# Altium PCB BOARD.PcbDoc
Units mm, origin at the board's own origin, x right, y up, seen from the top; angles counter-clockwise.
Board outline 40 x 23 mm, 2 copper layers (Top Layer, Bottom Layer), stack 1.18 mm thick; 82 components, 63 nets, 278 pads, 112 vias.
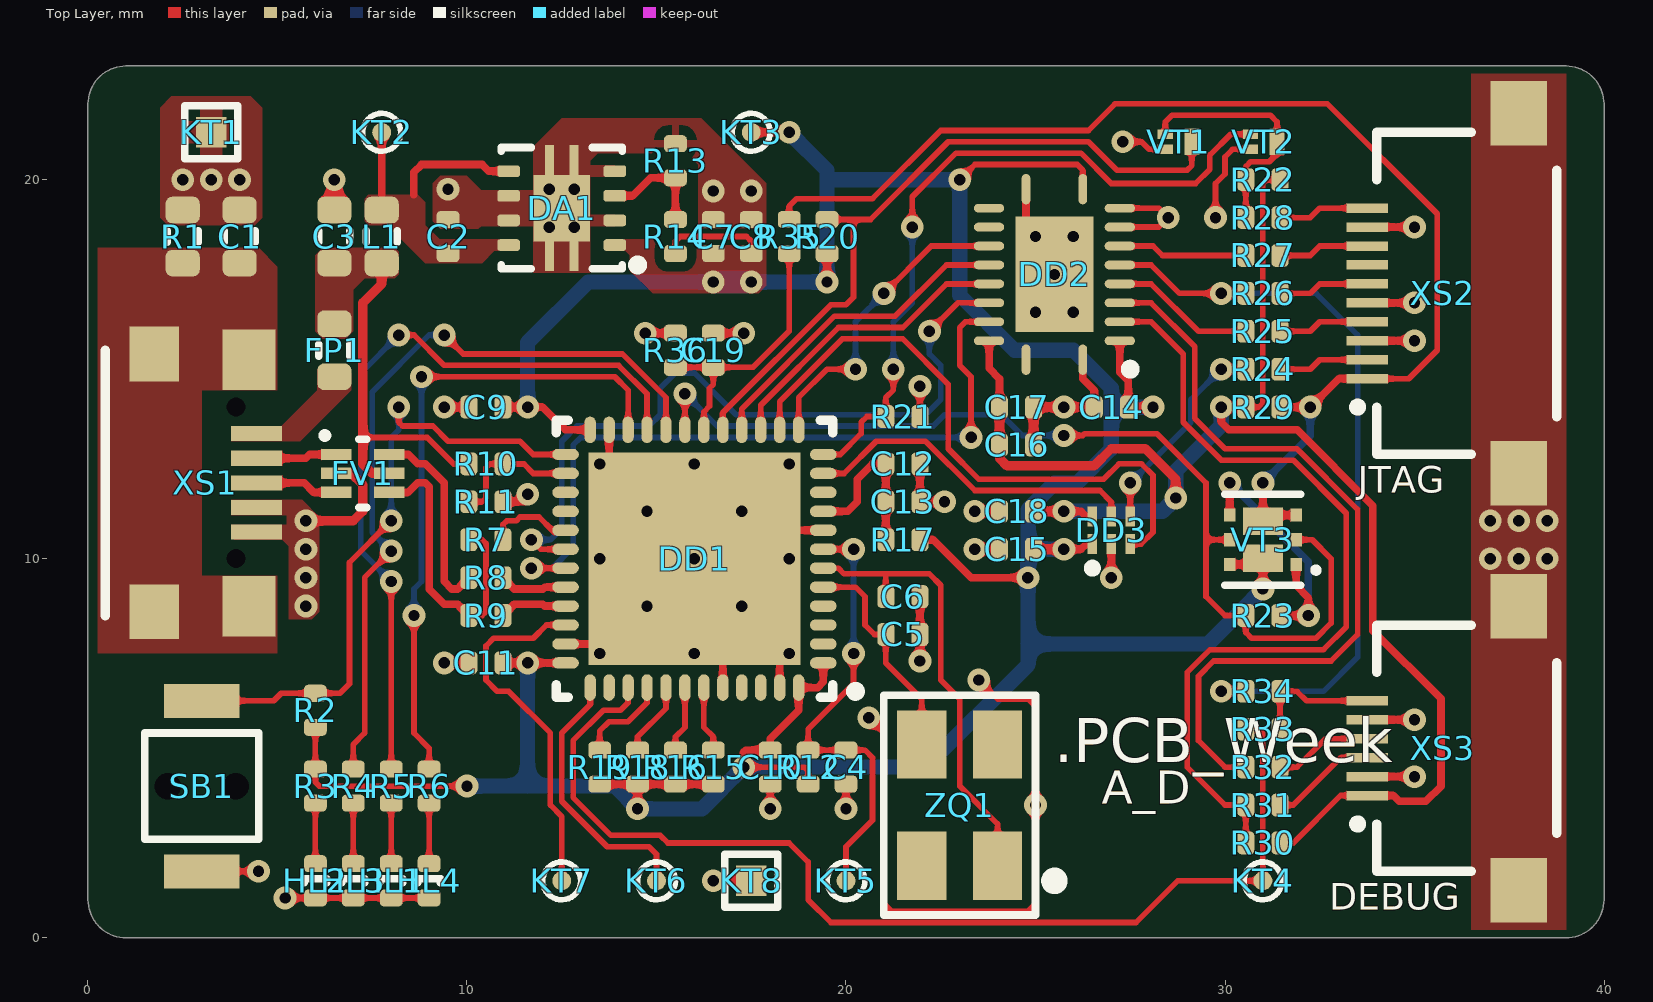
[diagram p0: Top Layer view]
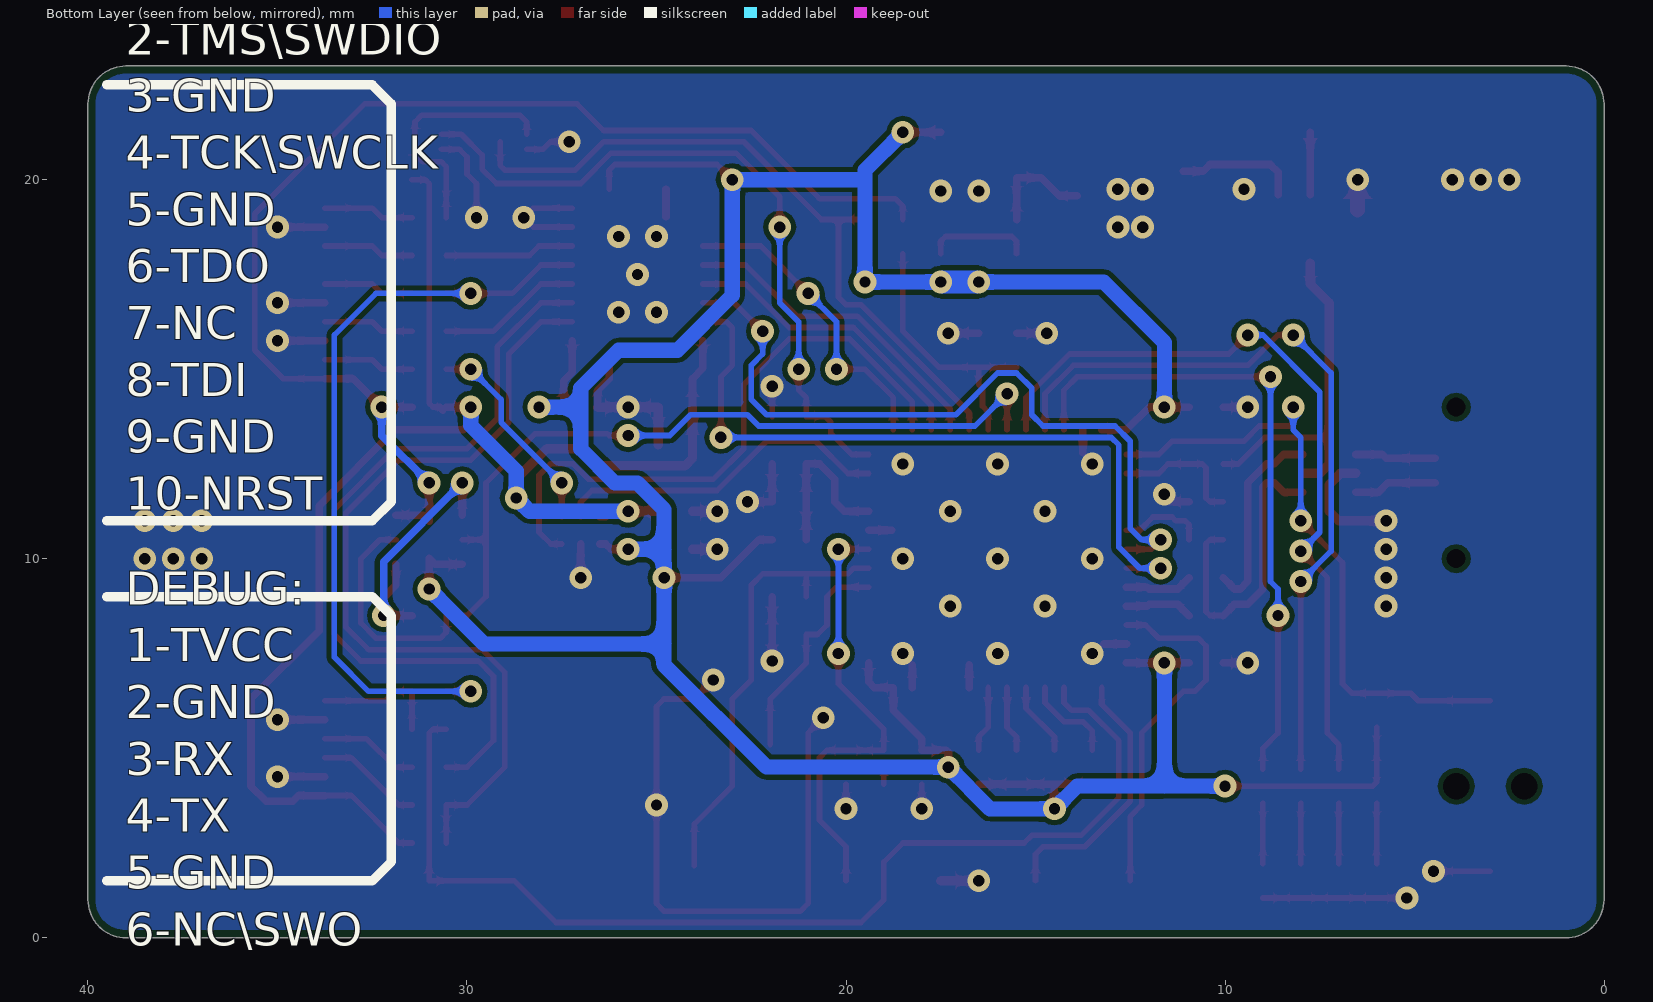
[diagram p1: Bottom Layer view, seen from below]
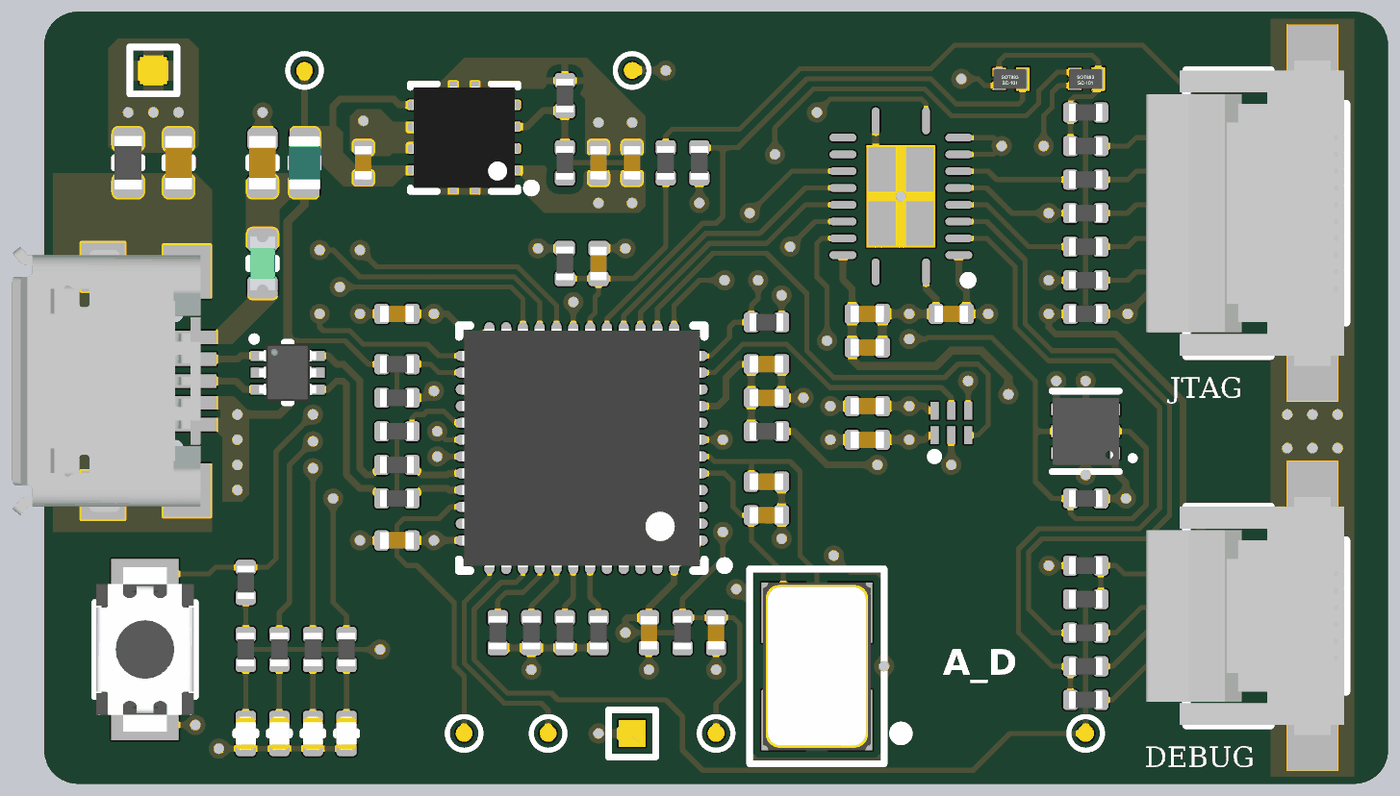
[diagram p2: 3D render of the assembled board from above, using the file's embedded part models]

## Layer stack, top to bottom
Top Solder: solder mask 0.01, Solder Resist, Dk 3.5
Top Layer: signal copper 0.03
Dielectric1: core 1.12, FR-4, Dk 4.2
Bottom Layer: signal copper 0.03
Bottom Solder: solder mask 0.01, Solder Resist, Dk 3.5

## Board outline
0,1 0,22 cw(c1,22) 1,23 39,23 cw(c39,22) 40,22 40,1 cw(c39,1) 39,0 1,0 cw(c1,1)

## Design rules (kind name [scope] priority, off if disabled: settings)
BoardOutlineClearance [All] p1: gap=0.2 ignorepadtopadclearanceinfootprint=FALSE
Clearance [All] p1: gap=0.127 ignorepadtopadclearanceinfootprint=FALSE
ComponentClearance [All] p1 off: gap=0.25 collisioncheckmode=3 verticalgap=0.25 showdistances=FALSE
DiffPairsRouting [All] p1: maxlimit=0.4 minlimit=0.15 mostfreqgap=0.25 toplayer_minwidth=0.2 toplayer_maxwidth=0.4 toplayer_prefwidth=0.25 bottomlayer_minwidth=0.2 bottomlayer_maxwidth=0.4 bottomlayer_prefwidth=0.25 maxuncoupledlength=12
Height [All] p1: minheight=0 maxheight=25 prefheight=25
HoleSize [All] p1: absolutevalues=TRUE maxlimit=6 minlimit=0.3 maxpercent=80.000 minpercent=20.000
HoleToHoleClearance [All] p1: gap=0.25 allowstackedmicrovias=TRUE
MatchedLengths "Schematic Matched Net Lengths" [InNet('USBD_N')] p1: tolerance=1 checknetsindiffpair=TRUE checkdiffpairvsdiffpair=FALSE checkxsignals=FALSE checkothers=FALSE
MatchedLengths "Schematic Matched Net Lengths_1" [InNet('USBD_P')] p2: tolerance=1 checknetsindiffpair=TRUE checkdiffpairvsdiffpair=FALSE checkxsignals=FALSE checkothers=FALSE
MinimumSolderMaskSliver [All] p1 off: minsoldermaskwidth=0.254
PlaneClearance [All] p1: clearance=0.5
PlaneConnect [All] p1: planeconnectstyle=Relief reliefexpansion=0.5 reliefentries=4 reliefconductorwidth=0.25 reliefairgap=0.25
PolygonConnect PolygonConnect_DirectConnect [InComponentClass('DirectConnect')] p1: connectstyle=Direct reliefconductorwidth=0.254 reliefentries=4 polygonreliefangle="90 Angle" airgapwidth=0.254
PolygonConnect PolygonConnect_Components [InComponent('C*') OR InComponent('R*') OR InComponent('NR*') OR InComponent('DA*') OR InComponent('DD*') OR InComponent('HL*')] p2: connectstyle=Relief reliefconductorwidth=0.2 reliefentries=4 polygonreliefangle="90 Angle" airgapwidth=0.25
PolygonConnect PolygonConnect_Connectors [All vs (InPadClass('All Pads'))] p3: connectstyle=Relief reliefconductorwidth=0.6 reliefentries=4 polygonreliefangle="90 Angle" airgapwidth=0.3
PolygonConnect PolygonConnect_Via [All] p4: connectstyle=Direct reliefconductorwidth=0.254 reliefentries=4 polygonreliefangle="90 Angle" airgapwidth=0.254
RoutingCorners [All] p1: cornerstyle=45-Degree minsetback=1.5 maxsetback=3.5
RoutingVias [All] p1: holewidth=0.6 width=1.2 viastyle="Through Hole" minholewidth=0.3 minwidth=0.6 maxholewidth=1 maxwidth=2
SMDEntry [All] p1: side=TRUE corner=TRUE anyangle=TRUE
SilkToSilkClearance [All] p1 off: silktosilkclearance=0.254
SilkToSolderMaskClearance [IsPad] p1 off: minsilkscreentomaskgap=0.254 clearancetoexposedcopper=TRUE
SolderMaskExpansion [All] p1: expansion=0.05
Width [All] p1: maxlimit=8 minlimit=0.15 preferedwidth=0.6
Width Width_TrackEnds [All] p2 off: maxlimit=0.25 minlimit=0.25 preferedwidth=0.25 checkconnectedcopper=TRUE
19 further rules are at their usual default settings.

## Classes and differential pairs
component class DirectConnect: C1 C2 C3 C7 C8 DA1 FP1 L1 R1 XS1 XS2 XS3
differential pair class USB: USBD
differential pair USBD: +USBD_P -USBD_N

## Components (designator, comment, footprint, x,y, rotation, side; value= is the part's Value field where it differs from the comment)
C1 "Capacitor" C0603_L 4,18.5 r270 top value=0.1uF
C2 "Capacitor" C0402_L 9.5,18.5 r270 top value=4.7uF
C3 "Capacitor" C0603_L 6.5,18.5 r270 top value=10uF
C4 "Capacitor" C0402_L 20,4.5 r90 top value=0.1uF
C5 "Capacitor" C0402_L 21.5,8 r180 top value=15pF
C6 "Capacitor" C0402_L 21.5,9 r180 top value=15pF
C7 "Capacitor" C0402_L 16.5,18.5 r270 top value=4.7uF
C8 "Capacitor" C0402_L 17.5,18.5 r270 top value=4.7uF
C9 "Capacitor" C0402_L 10.5,14 r0 top value=0.1uF
C10 "Capacitor" C0402_L 18,4.5 r90 top value=0.1uF
C11 "Capacitor" C0402_L 10.5,7.25 r0 top value=0.1uF
C12 "Capacitor" C0402_L 21.5,12.5 r0 top value=1uF
C13 "Capacitor" C0402_L 21.5,11.5 r180 top value=0.1uF
C14 "Capacitor" C0402_L 27,14 r0 top value=0.1uF
C15 "Capacitor" C0402_L 24.5,10.25 r0 top value=0.1uF
C16 "Capacitor" C0402_L 24.5,13 r0 top value=1uF
C17 "Capacitor" C0402_L 24.5,14 r180 top value=0.1uF
C18 "Capacitor" C0402_L 24.5,11.25 r0 top value=0.1uF
C19 "Capacitor" C0402_L 16.5,15.5 r270 top value=0.1uF
DA1 "TPS73701DRB" VSON-8_065P300X300X100_N 12.5,19.25 r90 top value=TPS73701DRBR
DD1 "STM32F103CxUx-Series" UFQFPN-48_050P700X700X060_N 16,10 r180 top locked value=STM32F103CBU6
DD2 "TXS0108ERGY" VQFN-20_050P450X350X100_N 25.5,17.5 r90 top locked value=TXS0108ERGYR
DD3 "74LVC1T45x-Series" X2-DFN-6_050P140X100X040_N 27,10.75 r0 top value=74LVC1T45FZ4-7
FP1 "Fuse_PTC" F0603_L 6.5,15.5 r90 top value=0603L100SLYR
FV1 "USBLC6-2x6" SOT-666_050P160X120X060_N 7.25,12.25 r270 top value=USBLC6-2P6
HL1 "" LD0402_L 8,1.5 r270 top value=KPHHS-1005SURCK
HL2 "Text" LD0402_L 6,1.5 r270 top value=KPHHS-1005CGCK
HL3 "Text" LD0402_L 7,1.5 r270 top value=KPHHS-1005CGCK
HL4 "" LD0402_L 9,1.5 r270 top value=KPHHS-1005QBC-D-V
KT1 "Text" TP-SMT-R-0.8mm 3.25,21.25 r0 top value=TestPoint-SMT
KT2 "Text" TP-SMT-C-0.5mm 7.75,21.25 r0 top value=TestPoint-SMT
KT3 "Text" TP-SMT-C-0.5mm 17.5,21.25 r0 top value=TestPoint-SMT
KT4 "SWO" TP-SMT-C-0.5mm 31,1.5 r0 top value=TestPoint-SMT
KT5 "SWO" TP-SMT-C-0.5mm 20,1.5 r0 top value=TestPoint-SMT
KT6 "SWO" TP-SMT-C-0.5mm 15,1.5 r0 top value=TestPoint-SMT
KT7 "SWO" TP-SMT-C-0.5mm 12.5,1.5 r0 top value=TestPoint-SMT
KT8 "Text" TP-SMT-R-0.8mm 17.5,1.5 r0 top value=TestPoint-SMT
L1 "FerriteBead" L0603_L 7.75,18.5 r90 top value=BLM18PG121SN1
R1 "Resistor" R0603_L 2.5,18.5 r270 top value=0
R2 "Resistor" R0402_L 6,6 r270 top value=10k
R3 "Resistor" R0402_L 6,4 r90 top value=1k
R4 "Resistor" R0402_L 7,4 r90 top value=1k
R5 "Resistor" R0402_L 8,4 r90 top value=1k
R6 "Resistor" R0402_L 9,4 r90 top value=1k
R7 "Resistor" R0402_L 10.5,10.5 r0 top value=1.6k
R8 "Resistor" R0402_L 10.5,9.5 r0 top value=20
R9 "Resistor" R0402_L 10.5,8.5 r0 top value=20
R10 "Resistor" R0402_L 10.5,12.5 r180 top value=4.7k
R11 "Resistor" R0402_L 10.5,11.5 r180 top value=10k
R12 "Resistor" R0402_L 19,4.5 r270 top value=10k
R13 "Resistor" R0402_L 15.5,20.5 r270 top value=12k
R14 "Resistor" R0402_L 15.5,18.5 r270 top value=22.1k
R15 "Resistor" R0402_L 16.5,4.5 r270 top value=0
R16 "Resistor" R0402_L 15.5,4.5 r270 top value=0
R17 "Resistor" R0402_L 21.5,10.5 r0 top value=0
R18 "Resistor" R0402_L 14.5,4.5 r270 top value=0
R19 "Resistor" R0402_L 13.5,4.5 r270 top value=0
R20 "Resistor" R0402_L 19.5,18.5 r270 top value=10k
R21 "Resistor" R0402_L 21.5,13.75 r0 top value=10k
R22 "Resistor" R0402_L 31,20 r0 top value=10k
R23 "Resistor" R0402_L 31,8.5 r0 top value=10k
R24 "Resistor" R0402_L 31,15 r0 top value=100
R25 "Resistor" R0402_L 31,16 r0 top value=100
R26 "Resistor" R0402_L 31,17 r0 top value=100
R27 "Resistor" R0402_L 31,18 r0 top value=100
R28 "Resistor" R0402_L 31,19 r0 top value=100
R29 "Resistor" R0402_L 31,14 r0 top value=100
R30 "Resistor" R0402_L 31,2.5 r180 top value=10k
R31 "Resistor" R0402_L 31,3.5 r0 top value=100
R32 "Resistor" R0402_L 31,4.5 r0 top value=100
R33 "Resistor" R0402_L 31,5.5 r180 top value=0
R34 "Resistor" R0402_L 31,6.5 r180 top value=0
R35 "Resistor" R0402_L 18.5,18.5 r90 top value=4.7k
R36 "Resistor" R0402_L 15.5,15.5 r270 top value=10k
SB1 "" IT-1185AP 3,4 r180 top locked value=IT-1185AP
VT1 "MOSFET-N" SOT-883B_035P060X100X040_N 28.75,21 r270 top value=NX3008NBKMB
VT2 "MOSFET-N" SOT-883B_035P060X100X040_N 31,21 r270 top value=NX3008NBKMB
VT3 "MOSFET-PP_8p_2" SOT-1118-2M_065P200X200X065_N 31,10.5 r90 top value=PMDPB70XP
XS1 "USB" 1981568-1 2,12 r270 top locked value=1981568-1
XS2 "JTAG" XF2M-1015-1A 36,17 r270 top locked value=XF2M-1015-1A
XS3 "DEBUG" XF2M-0615-1A 36,5 r270 top locked value=XF2M-0615-1A
ZQ1 "Crystal" "SMD 5x3.2mm" 23,3.5 r90 top value="KX-9A 8.0 MHz 30/50/100 16 pF"

## Footprints (in the part's own frame and the unit in brackets; to place one, negate y for a bottom-side part, rotate by r counter-clockwise, add the part's x,y. Pads: shape width x height; smd on the part's side, far side on the other; paste and mask are expansions set on the pad)
1981568-1 [mm]
  round 0 hole 0.5 unplated: 0(-2,1.9) 0(2,1.9)
  rect 0.4x1.35 smd: 1(-1.3,2.45) 2(-0.65,2.45) 3(0,2.45) 4(0.65,2.45) 5(1.3,2.45)
  rect 1.45x1.3 smd: 6(-3.4,-0.25) 6(3.4,-0.25)
  rect 1.6x1.4 smd: 6(-3.25,2.25) 6(3.25,2.25)
  silkscreen extent -3.5,-1.55 3.5,-1.55, body extent -4,-2.95 4,2.65, height 2.79
C0402_L [mm] "Chip Capacitor; Body 1.0 x 0.5 mm (LxW typ)"
  rrect50% 0.45x0.6 smd: 1(-0.45,0) 2(0.45,0)
  body extent -0.5,-0.25 0.5,0.25, height 0.61
C0603_L [mm] "Chip Capacitor; Body 1.6 x 0.8 mm (LxW typ)"
  rrect50% 0.7x0.9 smd: 1(-0.7,0) 2(0.7,0)
  silkscreen extent -0.15,-0.41 0.15,0.41, body extent -0.8,-0.4 0.8,0.4, height 0.91
F0603_L [mm] "1608M"
  rrect50% 0.7x0.9 smd: 1(-0.7,0) 2(0.7,0)
  silkscreen extent -0.15,-0.41 0.15,0.41, body extent -0.8,-0.37 0.8,0.38, height 0.75
IT-1185AP [mm]
  rect 2x0.9 smd: 1(0,2.25) 2(0,-2.25)
  round 0.1 hole 0.7 unplated: 4(-0.9,0) 4(0.9,0)
  silkscreen extent -1.5,-1.4 1.5,1.4, body extent -1.45,-2.45 1.45,2.45, height 2.04
L0603_L [mm] "Chip Coil; Body 1.6 x 0.8 mm (LxW typ)"
  rrect50% 0.7x0.9 smd: 1(-0.7,0) 2(0.7,0)
  silkscreen extent -0.15,-0.41 0.15,0.41, body extent -0.8,-0.47 0.8,0.48, height 0.8
LD0402_L [mm] "Chip Led; Body 1.0 x 0.5 mm (LxW typ)"
  rrect50% 0.45x0.6 smd mask+0.05: 1(-0.452,0) 2(0.452,0)
  silkscreen extent -0.05,-0.3 0.05,0.3, body extent -0.5,-0.3 0.5,0.3, height 0.2
R0402_L [mm] "Chip Resistor; Body 1.0 x 0.5 mm (LxW typ)"
  rrect50% 0.45x0.6 smd: 1(-0.45,0) 2(0.45,0)
  body extent -0.5,-0.26 0.5,0.26, height 0.36
R0603_L [mm] "Chip Resistor; Body 1.6 x 0.8 mm (LxW typ)"
  rrect50% 0.7x0.9 smd: 1(-0.7,0) 2(0.7,0)
  silkscreen extent -0.15,-0.41 0.15,0.41, body extent -0.8,-0.41 0.8,0.41, height 0.46
"SMD 5x3.2mm" [mm]
  rect 1.8x1.3 smd: 1(-1.6,-1) 2(1.6,-1) 3(1.6,1) 4(-1.6,1)
  silkscreen extent -2.9,-2.6 2.9,2, body extent -2.5,-1.6 2.5,1.6, height 1.01
SOT-666_050P160X120X060_N [mm]
  rect 0.3x0.8 smd: 1(-0.5,-0.7) 2(0,-0.7) 3(0.5,-0.7) 4(0.5,0.7) 5(0,0.7) 6(-0.5,0.7)
  silkscreen extent -1.08,-1.08 0.9,0.1, body extent -0.85,-0.85 0.85,0.85, height 0.62
SOT-883B_035P060X100X040_N [mm]
  rect 0.25x0.4 smd paste-10: 1(-0.2,-0.325) 3(0.2,-0.325)
  rect 0.7x0.4 smd paste-0.05: 2(0,0.375)
  body extent -0.29,-0.49 0.29,0.49, height 0.48
SOT-1118-2M_065P200X200X065_N [mm] "DFN2020-6"
  rect 0.35x0.3 smd mask+0.05: 1(-0.65,-0.875) 2(0,-0.875) 3(0.65,-0.875) 4(0.65,0.875) 5(0,0.875) 6(-0.65,0.875)
  rect 0.72x1.05 smd mask+0.05: 3(0.49,0) 6(-0.49,0)
  silkscreen extent -1.2,-1.45 1.2,1, body extent -1,-1 1,1, height 0.65
TP-SMT-C-0.5mm [mm]
  round 0.5 smd paste-1: 1(0,0)
  silkscreen extent -0.5,-0.5 0.5,0.5
TP-SMT-R-0.8mm [mm]
  rect 0.8x0.8 smd paste-1: 1(0,0)
  silkscreen extent -0.7,-0.7 0.7,0.7
UFQFPN-48_050P700X700X060_N [mm] "QFN, 48-Leads, Body 7,00x7,00mm, Pitch 0,50mm, Thermal Pad 5,60x5,60mm, IPC Medium Density"
  oval 0.7x0.3 smd: 1(-3.4,2.75) 2(-3.4,2.25) 3(-3.4,1.75) 4(-3.4,1.25) 5(-3.4,0.75) 6(-3.4,0.25) 7(-3.4,-0.25) 8(-3.4,-0.75) 9(-3.4,-1.25) 10(-3.4,-1.75) 11(-3.4,-2.25) 12(-3.4,-2.75) 25(3.4,-2.75) 26(3.4,-2.25) 27(3.4,-1.75) 28(3.4,-1.25) 29(3.4,-0.75) 30(3.4,-0.25) 31(3.4,0.25) 32(3.4,0.75) 33(3.4,1.25) 34(3.4,1.75) 35(3.4,2.25) 36(3.4,2.75)
  oval 0.3x0.7 smd: 13(-2.75,-3.4) 14(-2.25,-3.4) 15(-1.75,-3.4) 16(-1.25,-3.4) 17(-0.75,-3.4) 18(-0.25,-3.4) 19(0.25,-3.4) 20(0.75,-3.4) 21(1.25,-3.4) 22(1.75,-3.4) 23(2.25,-3.4) 24(2.75,-3.4) 37(2.75,3.4) 38(2.25,3.4) 39(1.75,3.4) 40(1.25,3.4) 41(0.75,3.4) 42(0.25,3.4) 43(-0.25,3.4) 44(-0.75,3.4) 45(-1.25,3.4) 46(-1.75,3.4) 47(-2.25,3.4) 48(-2.75,3.4)
  rect 5.6x5.6 smd: TP(0,0)
  silkscreen extent -4.38,-3.65 3.65,3.65, body extent -3.55,-3.55 3.55,3.55, height 0.6
VQFN-20_050P450X350X100_N [mm]
  oval 0.8x0.23 smd: 1(-2.25,-0.75) 10(2.25,-0.75) 11(2.25,0.75) 20(-2.25,0.75)
  oval 0.23x0.8 smd: 2(-1.75,-1.725) 3(-1.25,-1.725) 4(-0.75,-1.725) 5(-0.25,-1.725) 6(0.25,-1.725) 7(0.75,-1.725) 8(1.25,-1.725) 9(1.75,-1.725) 12(1.75,1.725) 13(1.25,1.725) 14(0.75,1.725) 15(0.25,1.725) 16(-0.25,1.725) 17(-0.75,1.725) 18(-1.25,1.725) 19(-1.75,1.725)
  rect 3.05x2.05 smd paste-10: TP(0,0)
  silkscreen extent -2.62,-2.13 -2.38,-1.88, body extent -2.25,-1.75 2.25,1.75, height 1
VSON-8_065P300X300X100_N [mm]
  rrect50% 0.31x0.6 smd paste-0.025: 1(-0.975,-1.4) 2(-0.325,-1.4) 3(0.325,-1.4) 4(0.975,-1.4) 5(0.975,1.4) 6(0.325,1.4) 7(-0.325,1.4) 8(-0.975,1.4)
  rect 0.825x0.23 smd: TP(-1.25,-0.325) TP(-1.25,0.325) TP(1.25,-0.325) TP(1.25,0.325)
  rect 1.75x1.5 smd: TP(0,0)
  silkscreen extent -1.62,-2.13 1.6,1.6, body extent -1.52,-1.52 1.52,1.52, height 1.04
X2-DFN-6_050P140X100X040_N [mm]
  rect 0.25x0.525 smd: 1(-0.5,-0.363) 2(0,-0.363) 3(0.5,-0.363) 4(0.5,0.363) 5(0,0.363) 6(-0.5,0.363)
  silkscreen extent -0.6,-1.1 -0.4,-0.9, body extent -0.7,-0.5 0.7,0.5, height 0.4
XF2M-0615-1A [mm]
  rect 0.25x1.1 smd mask+0.025: 1(1.25,-2.25) 2(0.75,-2.25) 3(0.25,-2.25) 4(-0.25,-2.25) 5(-0.75,-2.25) 6(-1.25,-2.25)
  rect 1.7x1.5 smd mask+0.025: SH(-3.75,1.75) SH(3.75,1.75)
  silkscreen extent -3.25,-2.6 3.25,2.75, body extent -3.55,-3.2 3.55,2.7, height 2
XF2M-1015-1A [mm]
  rect 0.25x1.1 smd mask+0.025: 1(2.25,-2.25) 2(1.75,-2.25) 3(1.25,-2.25) 4(0.75,-2.25) 5(0.25,-2.25) 6(-0.25,-2.25) 7(-0.75,-2.25) 8(-1.25,-2.25) 9(-1.75,-2.25) 10(-2.25,-2.25)
  rect 1.7x1.5 smd mask+0.025: SH(-4.75,1.75) SH(4.75,1.75)
  silkscreen extent -4.25,-2.6 4.25,2.75, body extent -4.55,-3.2 4.55,2.7, height 2

## Part data
C1: library part GRM188R72A104KA35D, Dielectric Type=X7R, Manufacturer=Murata, Tolerance=±10%, Voltage=100V, Working Temperature Max=+125°С, Working Temperature Min=-55°С, Application Category=1, ClassName=DirectConnect, ID=232, Part Number=GRM188R72A104KA35D, Published=18.05.2010, Publisher="Andrew Danich", Type=Конденсатор
C2 C7 C8: library part GRM155R60J475ME87D, Dielectric Type=X5R, Manufacturer=Murata, Tolerance=±20%, Voltage=6.3V, Working Temperature Max=+85°С, Working Temperature Min=-55°С, Application Category=1, ClassName=DirectConnect, ID=223, Part Number=GRM155R60J475ME87D, Published=18.05.2010, Publisher="Andrew Danich", Type=Конденсатор
C3: library part GRM188R60J106ME47D, Dielectric Type=X5R, Manufacturer=Murata, Tolerance=±20%, Voltage=6.3V, Working Temperature Max=+85°С, Working Temperature Min=-55°С, Application Category=1, ClassName=DirectConnect, ID=136, Part Number=GRM188R60J106ME47D, Published=18.05.2010, Publisher="Andrew Danich", Type=Конденсатор
C4 C9 C10 C11 C13 C14 C15 C17 C18 C19: library part GCM155R71C104KA55D, Dielectric Type=X7R, Manufacturer=Murata, Tolerance=±10%, Voltage=16V, Working Temperature Max=+125°С, Working Temperature Min=-55°С, Application Category=1, Functional Analog=GRM155R71C104KA88D, ID=163, Part Number=GCM155R71C104KA55D, Published=18.05.2010, Publisher="Andrew Danich", Type=Конденсатор
C5 C6: library part GRM1555C1H150JA01D, Dielectric Type=NP0, Manufacturer=Murata, Tolerance=±5%, Voltage=50V, Working Temperature Max=+125°С, Working Temperature Min=-55°С, Application Category=1, ID=193, Part Number=GRM1555C1H150JA01D, Published=18.05.2010, Publisher="Andrew Danich", Type=Конденсатор
C12 C16: library part GRM155C71A105KE11D, Dielectric Type=X7S, Manufacturer=Murata, Tolerance=±10%, Voltage=10V, Working Temperature Max=+125°С, Working Temperature Min=-55°С, Application Category=1, ID=179, Part Number=GRM155C71A105KE11D, Published=18.05.2010, Publisher="Andrew Danich", Type=Конденсатор
DA1: library part TPS73701DRBR, Input Voltage=+2.2…5.5V, Manufacturer="Texas Instruments", Output Current=1A, Output Voltage=+1.2…5.5V, Working Temperature Max=+125°С, Working Temperature Min=-40°С, Application Category=1, ClassName=DirectConnect, Functional Analog=TPS73701DRBT, ID=26, Part Number=TPS73701DRBR, Published=25.03.2019, Publisher="Andrew Danich", Type=Микросхема
DD1: library part STM32F103CBU6, Manufacturer=STMicroelectronics, Operation Frequency=72MHz, Working Temperature Max=+85°С, Working Temperature Min=-40°С, Application Category=1, EEPROM=-, Flash=128K, I/O Lines=37, ID=30, Part Number=STM32F103CBU6, Prog Interface="JTAG, SWD, UART", Published=17.05.2019, Publisher="Andrew Danich", SRAM=20K, Supply Operation=+2.0…3.6V, Type=Микросхема
DD2: library part TXS0108ERGYR, Manufacturer="Texas Instruments", Supply Current=6uA, Working Temperature Max=+85°С, Working Temperature Min=-40°С, Application Category=1, Channels=8, Directional=Bidirection, ID=14, Max Data Rate=110Mbps, Part Number=TXS0108ERGYR, Prop Delay=11.1nS, Published=08.01.2019, Publisher="Andrew Danich", Supply 1 Operation=+1.2…3.6V, Supply 2 Operation=+1.65…5.5V, Type=Микросхема
DD3: library part 74LVC1T45FZ4-7, Manufacturer="Diodes Incorporated", Supply Current=3uA, Working Temperature Max=+150°С, Working Temperature Min=-40°С, Application Category=1, Channels=1, Directional=Bidirection, ID=13, Part Number=74LVC1T45FZ4-7, Prop Delay=15.1nS, Published=17.07.2019, Publisher="Andrew Danich", Supply 1 Operation=+1.65…5.5V, Supply 2 Operation=+1.65…5.5V, Type=Микросхема
FP1: library part 0603L100SLYR, Limit Voltage=6V, Manufacturer=Littelfuse, Rated Current=1A, Resistance=0.12ohm, Working Temperature Max=+85°С, Working Temperature Min=-40°С, Application Category=1, ClassName=DirectConnect, Functional Analog=-, ID=13, Part Number=0603L100SLYR, Published=25.0.2017, Type="Предохранитель самовосстанавливающийся"
FV1: library part USBLC6-2P6, Breakdown Voltage=6V, Forward Voltage=0.95V, Junction Capacitance=2.5pF, Manufacturer=STMicroelectronics, Peak Forward Current=5A, Reverse Stand Off Voltage=17V, Working Temperature Max=+125°С, Working Temperature Min=-40°С, Application Category=1, Directional=Bidirectional, Functional Analog=-, ID=30, Part Number=USBLC6-2P6, Published=21.02.2017, Publisher="Andrew Danich", Type=Супрессор
HL1: library part KPHHS-1005SURCK, Color=Red, Forward Current=20mA, Forward Voltage=2.5V, Manufacturer=Kingbright, Power Dissipation=75mW, Working Temperature Max=+85°С, Working Temperature Min=-40°С, Application Category=1, ID=35, Leds=1, Luminous Flux=140, Part Number=KPHHS-1005SURCK, Published=03.12.2013, Publisher="Andrew Danich", Type="Индикатор единичный"
HL2 HL3: library part KPHHS-1005CGCK, Color=Green, Forward Current=20mA, Forward Voltage=2.1V, Manufacturer=Kingbright, Power Dissipation=75mW, Working Temperature Max=+85°С, Working Temperature Min=-40°С, Application Category=1, ID=25, Leds=1, Luminous Flux=60, Part Number=KPHHS-1005CGCK, Published=03.12.2013, Publisher="Andrew Danich", Type="Индикатор единичный"
HL4: library part KPHHS-1005QBC-D-V, Color=Blue, Forward Current=20mA, Forward Voltage=3.3V, Manufacturer=Kingbright, Power Dissipation=120mW, Working Temperature Max=+85°С, Working Temperature Min=-40°С, Application Category=1, ID=24, Leds=1, Luminous Flux=60, Part Number=KPHHS-1005QBC-D-V, Published=03.12.2013, Publisher="Andrew Danich", Type="Индикатор единичный"
KT1 KT8: library part TestPoint-SMT-GND, Manufacturer=-, Application Category=1, Application Type="On PCB Test Point", Functional Analog=-, ID=7, Part Number=TestPoint-SMT-GND, Published=03.03.2015, Publisher="Andrew Danich"
KT2 KT3 KT4 KT5 KT6 KT7: library part TestPoint-SMT, Manufacturer=-, Application Category=1, Application Type="On PCB Test Point", Functional Analog=-, ID=6, Part Number=TestPoint-SMT, Published=03.03.2015, Publisher="Andrew Danich"
L1: library part BLM18PG121SN1, DC Resistance=0.05ohm, Inductor Type=EMIFIL, Manufacturer=Murata, Rated Current=2A, Tolerance=±25%, Working Temperature Max=+125°С, Working Temperature Min=-55°С, Application Category=1, ClassName=DirectConnect, ID=4, Impedance at 100Mhz=120ohm, Part Number=BLM18PG121SN1, Published=14.11.2014, Publisher="Andrew Danich", Type=Дроссель
R1: library part RC0603JR-070R, Limit Voltage=50V, Manufacturer=Yageo, Temperature Coefficient=100ppm, Tolerance=±5%, Total Power Dissipation=0.1W, Working Temperature Max=+155°С, Working Temperature Min=-55°С, Application Category=1, ClassName=DirectConnect, Functional Analog="RC0603FR-070RL, CR0603-J/-000E", ID=5, Part Number=RC0603JR-070R, Published=24.03.2010, Publisher="Andrew Danich", Series Type=Thick-Film, Type=Резистор
R2 R11 R12 R20 R21 R22 R23 R30 R36: library part RC0402JR-0710KL, Limit Voltage=50V, Manufacturer=Yageo, Temperature Coefficient=100ppm, Tolerance=±5%, Total Power Dissipation=0.1W, Working Temperature Max=+155°С, Working Temperature Min=-55°С, Application Category=1, ID=476, Part Number=RC0402JR-0710KL, Published=24.03.2010, Publisher="Andrew Danich", Series Type=Thick-Film, Type=Резистор
R3 R4 R5 R6: library part RC0402JR-071KL, Limit Voltage=50V, Manufacturer=Yageo, Temperature Coefficient=100ppm, Tolerance=±5%, Total Power Dissipation=0.1W, Working Temperature Max=+155°С, Working Temperature Min=-55°С, Application Category=1, ID=3, Part Number=RC0402JR-071KL, Published=24.03.2010, Publisher="Andrew Danich", Series Type=Thick-Film, Type=Резистор
R7: library part RC0402FR-071K6L, Limit Voltage=50V, Manufacturer=Yageo, Temperature Coefficient=100ppm, Tolerance=±1%, Total Power Dissipation=0.1W, Working Temperature Max=+155°С, Working Temperature Min=-55°С, Application Category=1, ID=504, Part Number=RC0402FR-071K6L, Published=24.03.2010, Publisher="Andrew Danich", Series Type=Thick-Film, Type=Резистор
R8 R9: library part RC0402JR-0720RL, Limit Voltage=50V, Manufacturer=Yageo, Temperature Coefficient=100ppm, Tolerance=±5%, Total Power Dissipation=0.1W, Working Temperature Max=+155°С, Working Temperature Min=-55°С, Application Category=1, ID=369, Part Number=RC0402JR-0720RL, Published=24.03.2010, Publisher="Andrew Danich", Series Type=Thick-Film, Type=Резистор
R10 R35: library part RC0402JR-074K7L, Limit Voltage=50V, Manufacturer=Yageo, Temperature Coefficient=100ppm, Tolerance=±5%, Total Power Dissipation=0.1W, Working Temperature Max=+155°С, Working Temperature Min=-55°С, Application Category=1, ID=4, Part Number=RC0402JR-074K7L, Published=24.03.2010, Publisher="Andrew Danich", Series Type=Thick-Film, Type=Резистор
R13: library part RC0402FR-0712KL, Limit Voltage=50V, Manufacturer=Yageo, Temperature Coefficient=100ppm, Tolerance=±1%, Total Power Dissipation=0.1W, Working Temperature Max=+155°С, Working Temperature Min=-55°С, Application Category=1, ID=318, Part Number=RC0402FR-0712KL, Published=24.03.2010, Publisher="Andrew Danich", Series Type=Thick-Film, Type=Резистор
R14: library part RC0402FR-0722K1L, Limit Voltage=50V, Manufacturer=Yageo, Temperature Coefficient=100ppm, Tolerance=±1%, Total Power Dissipation=0.1W, Working Temperature Max=+155°С, Working Temperature Min=-55°С, Application Category=1, ID=447, Part Number=RC0402FR-0722K1L, Published=24.03.2010, Publisher="Andrew Danich", Series Type=Thick-Film, Type=Резистор
R15 R16 R17 R18 R19 R33 R34: library part RC0402JR-070RL, Limit Voltage=50V, Manufacturer=Yageo, Temperature Coefficient=100ppm, Tolerance=±5%, Total Power Dissipation=0.1W, Working Temperature Max=+155°С, Working Temperature Min=-55°С, Application Category=1, ID=362, Part Number=RC0402JR-070RL, Published=24.03.2010, Publisher="Andrew Danich", Series Type=Thick-Film, Type=Резистор
R24 R25 R26 R27 R28 R29 R31 R32: library part RC0402JR-07100RL, Limit Voltage=50V, Manufacturer=Yageo, Temperature Coefficient=100ppm, Tolerance=±5%, Total Power Dissipation=0.1W, Working Temperature Max=+155°С, Working Temperature Min=-55°С, Application Category=1, ID=479, Part Number=RC0402JR-07100RL, Published=24.03.2010, Publisher="Andrew Danich", Series Type=Thick-Film, Type=Резистор
SB1: library part IT-1185AP, Isolator Resistance=100meg, Limit Current=50mA, Resistance=0.1ohm, Application Category=1, Backlight=NO, Height=5mm, ID=36, Number of Contacts=2, Part Number=IT-1185AP, Published=17.04.2014, Publisher="Andrew Danich", Type=Переключатель
VT1 VT2: library part NX3008NBKMB, D-S On-Resistance=1.4omh, D-S Voltage=30V, Drain Current=530mA, Gate Capacitance=50pF, Gate Threshold Voltage=1.1V, Manufacturer="NXP Semiconductors", Total Power Dissipation=360mW, Working Temperature Max=+150°С, Working Temperature Min=-55°С, Application Category=1, Functional Analog=-, ID=36, Part Number=NX3008NBKMB, Published=24.09.2010, Publisher="Andrew Danich", Type=Транзистор
VT3: library part PMDPB70XP, D-S On-Resistance=87momh, D-S Voltage=-30V, Drain Current=-3.8A, Gate Capacitance=680pF, Gate Threshold Voltage=-1V, Manufacturer="NXP Semiconductors", Total Power Dissipation=490mW, Working Temperature Max=+150°С, Working Temperature Min=-55°С, Application Category=1, Functional Analog=-, ID=43, Part Number=PMDPB70XP, Published=18.07.2014, Publisher="Andrew Danich", Type="Сборка транзисторная"
XS1: library part 1981568-1, Limit Current=1A, Limit Voltage=24V, Manufacturer="TE Connectivity", Application Category=1, ClassName=DirectConnect, Connector Type=Female, ID=30, Interface="USB 2.0", Max Data Rate="480 mbps", Mount Type=Surface, Part Number=1981568-1, Pins=9, Published=11.04.2016, Publisher="Andrew Danich", Type=Розетка
XS2: library part XF2M-1015-1A, Limit Current=500mA, Limit Voltage=50V, Manufacturer="Omron Electronics", Resistance=0.05ohm, Working Temperature Max=+85°С, Working Temperature Min=-30°С, Application Category=1, ClassName=DirectConnect, Connector Type=Female, ID=7, Part Number=XF2M-1015-1A, Pins=10, Pitch=0.5mm, Published=07.09.2015, Publisher="Viktor Klishin", Series=FPC, Type=Розетка
XS3: library part XF2M-0615-1A, Limit Current=500mA, Limit Voltage=50V, Manufacturer="Omron Electronics", Resistance=0.05ohm, Working Temperature Max=+85°С, Working Temperature Min=-30°С, Application Category=1, ClassName=DirectConnect, Connector Type=Female, ID=6, Part Number=XF2M-0615-1A, Pins=6, Pitch=0.5mm, Published=16.02.2017, Publisher="Viktor Klishin", Series=FPC, Type=Розетка
ZQ1: library part "KX-9A 8.0 MHz 30/50/100 16 pF", Load Capacitance=16pF, Manufacturer=Geyer, Output Frequency=8MHz, Shunt Capacitance=5pF, Temperature Coefficient=±50ppm, Working Temperature Max=+70°С, Working Temperature Min=-20°С, Application Category=1, Functional Analog=-, ID=12, Part Number="KX-9A 8.0 MHz 30/50/100 16 pF", Published=08.03.2013, Publisher="Andrew Danich", Type=Резонатор

## Via types
v1: diameter 0.6, hole 0.3, Top Layer to Bottom Layer, tented both sides, 90 vias
v2: diameter 0.6, hole 0.3, Top Layer to Bottom Layer, 22 vias

## Nets (pads, with @x,y where several pads share a name; then routed paths per layer and width w, separated by ;. In a path a pad name is that pad's centre, name@x,y a point inside that pad or via, vN(x,y) a via of type N, cw(c..) or ccw(c..) an arc to the next point about the centre after c; other vN are vias at no path point)
AVCC3P3: C12.1 C13.2 DD1.9 R17.1 | length 4.5
  Top Layer w0.2: DD1.9 20.05,11.25 20.3,11.5 20.3,12.1 20.7,12.5 C12.1 C13.2 R17.1
DEBUG_RX: DD2.3 R30.2 R31.1 | length 22.3
  Top Layer w0.15: DD2.3 28.05,16.25 28.9,15.4 28.9,13.6 29.9,12.6 31.8,12.6 33.2,11.2 33.2,8.2 32.6,7.6 29.6,7.6 29,7 29,4.5 30,3.5 R31.1 R30.2
DEBUG_TX: DD2.4 R32.1 | length 20.8
  Top Layer w0.15: DD2.4 28.05,16.75 29.2,15.6 29.2,13.7 30,12.9 31.9,12.9 33.5,11.3 33.5,8 32.8,7.3 29.7,7.3 29.3,6.9 29.3,5.2 30,4.5 R32.1
GND: C1.1 C2.1 C3.1 C4.1 C5.1 C6.1 C7.1 C8.1 C9.1 C10.1 C11.1 C12.2 C13.1 C14.1 C15.1 C16.2 C17.1 C18.1 C19.1 DA1.2 DA1.4 DA1.6 DA1.7 DA1.TP DD1.8 DD1.23 DD1.35 DD1.44 DD1.47 DD1.TP DD2.1 DD2.8 DD2.9 DD2.11 DD2.TP DD3.2 FV1.2 HL1.2 HL2.2 HL3.2 HL4.2 KT1.1 KT8.1 R1.1 R11.1 R13.1 R21.2 R36.1 SB1.1 VT1.3 VT2.3 XS1.4 XS1.5 XS2.3 XS2.5 XS2.9 XS2.SH XS3.2 XS3.5 XS3.SH | length 58.1
  Top Layer w0.15: SB1.1 v1(4.5,1.75) ; v1(5.2,1.048) HL2.2 HL3.2 HL1.2 HL4.2 ; v1(18,3.4) C10.1 ; v1(20,3.4) C4.1 ; v1(20.6,5.8) 21,5.4 21,0.9 21.2,0.7 24.8,0.7 25,0.9 v1(25,3.5) 25,6.1 24.8,6.3 24,6.3 v1(23.5,6.8) ; R21.2 v1(21.95,14.55) ; DD2.8 28.25,18.75 v1(28.5,19) 28.25,19.25 DD2.9 ; v1(27.3,21) 27.8,21 28,20.8 VT1.3 ; v1(29.75,19) 29.75,19.9 30,20.15 30,20.6 30.2,20.8 VT2.3
  Top Layer w0.2: v1(9.4,7.25) C11.1 ; v1(9.4,14) C9.1 ; R11.1 11.4,11.5 v1(11.6,11.7) ; DD1.35 13.2,7.75 ; 13.75,12.8 DD1.23 ; v1(14.7,15.95) R36.1 ; C19.1 v1(17.3,15.95) ; DD1.44 16.75,7.2 ; DD1.47 18.25,7.2 ; 18.8,10.75 DD1.8 ; v1(21.95,7.3) C5.1 C6.1 ; C12.2 C13.1 v1(22.6,11.5) ; DD2.TP@24.75,19.025 DD2.11 ; DD2.1 26.25,14.75 26.55,14.45 C14.1 ; v1(27,9.5) DD3.2 ; XS3.2 v1(35,4.25) ; XS3.5 v1(35,5.75) ; XS2.3 v1(35,15.75) ; XS2.5 v1(35,16.75) ; XS2.9 v1(35,18.75)
  Top Layer w0.25: v1(5.75,11) 7,11 7.25,11.25 7.25,11.956 6.956,12.25 FV1.2 ; v1(16.5,1.5) KT8.1 ; v1(23.4,10.25) C15.1 ; v1(23.4,11.25) C18.1 ; C16.2 C17.1 C14.1
  Top Layer w0.4: C3.1 v1(6.5,20)
  other v1: 5.75,8.75 5.75,9.5 37,10 37.75,10 38.5,10 5.75,10.25 37,11 37.75,11 38.5,11 25.75,14 16.5,19.7 17.5,19.7 9.5,19.75 2.5,20 3.25,20 4,20
  other v2: 13.5,7.5 16,7.5 18.5,7.5 14.75,8.75 17.25,8.75 13.5,10 16,10 18.5,10 14.75,11.25 17.25,11.25 13.5,12.5 16,12.5 18.5,12.5 25,16.5 26,16.5 25.5,17.5 25,18.5 26,18.5 12.175,18.75 12.825,18.75 12.175,19.75 12.825,19.75
HW_SPEC: DD1.40 R19.1 | length 2.5
  Top Layer w0.15: R19.1 13.5,5.45 13.75,5.7 14.25,5.7 14.75,6.2 DD1.40
HW_VER_B0: DD1.41 R18.1 | length 2
  Top Layer w0.15: R18.1 14.5,5.3 15.25,6.05 DD1.41
HW_VER_B1: DD1.42 R16.1 | length 1.8
  Top Layer w0.15: R16.1 15.5,5.3 15.75,5.55 DD1.42
HW_VER_B2: DD1.43 R15.1 | length 1.8
  Top Layer w0.15: DD1.43 16.25,5.55 16.5,5.3 R15.1
JTAG_RST_N: R22.1 R28.1 VT1.1 VT2.2 | length 6.6
  Top Layer w0.15: VT1.1 28.425,21.525 28.6,21.7 31.2,21.7 31.375,21.525 VT2.2 31.375,20.675 31.173,20.473 30.675,20.473 30.55,20.348 R22.1 R28.1
JTAG_TCK: DD2.5 R25.1 | length 3.8
  Top Layer w0.15: DD2.5 28.05,17.25 29.3,16 R25.1
JTAG_TDI: DD2.7 R27.1 | length 3.4
  Top Layer w0.15: DD2.7 28.1,18.25 28.35,18 R27.1
JTAG_TDO: DD2.6 R26.1 R34.2 | length 20.8
  Top Layer w0.15: DD2.6 28.05,17.75 28.8,17 R26.1 ; v1(29.9,6.5) R34.2
  Bottom Layer w0.15: v1(29.9,6.5) 32.6,6.5 33.5,7.4 33.5,15.9 32.4,17 v1(29.9,17)
JTAG_TMS: DD3.4 R24.1 | length 5.5
  Top Layer w0.15: DD3.4 v1(27.5,12) ; v1(29.9,15) R24.1
  Bottom Layer w0.15: v1(27.5,12) 29.1,13.6 29.1,14.2 v1(29.9,15)
LED0: DD1.20 R4.2 | length 20.5
  Top Layer w0.15: R4.2 7,5.1 7.3,5.4 7.3,9.5 v1(8,10.2) ; v1(9.4,15.9) 9.9,15.4 14.1,15.4 15.25,14.25 DD1.20
  Bottom Layer w0.15: v1(8,10.2) 7.5,10.7 7.5,10.79 7.498,10.792 7.498,11.208 7.5,11.21 7.5,14.4 9,15.9 v1(9.4,15.9)
LED1: DD1.21 R5.2 | length 20.3
  Top Layer w0.15: R5.2 v1(8,9.4) ; v1(8.2,15.9) 8.6,15.9 9.4,15.1 14,15.1 14.75,14.35 DD1.21
  Bottom Layer w0.15: v1(8,9.4) 7.2,10.2 7.2,14.9 v1(8.2,15.9)
LED2: DD1.22 R6.2 | length 17.2
  Top Layer w0.15: v1(8.6,8.5) 8.6,5.4 9,5 R6.2 ; v1(8.8,14.8) 13.9,14.8 14.252,14.448 14.252,13.402 DD1.22
  Bottom Layer w0.15: v1(8.6,8.5) 8.6,9.2 8.8,9.4 v1(8.8,14.8)
NetC1_2: C1.2 R1.2 XS1.6
NetC2_2: C2.2 DA1.5 DA1.8 KT2.1 L1.2 | length 4.9
  Top Layer w0.2: 7.75,19.6 KT2.1 ; 8.6,19.6 8.6,20.2 8.8,20.4 10.4,20.4 10.575,20.225 DA1.5
NetC5_2: C5.2 DD1.5 ZQ1.3 | length 5.9
  Top Layer w0.15: DD1.5 20.25,9.25 20.5,9 20.5,8.25 20.75,8 C5.2 21.05,7.25 22,6.3 ZQ1.3
NetC6_2: C6.2 DD1.6 ZQ1.1 | length 11.9
  Top Layer w0.15: DD1.6 19.8,9.75 19.95,9.6 21.075,9.6 ; C6.2 21.05,9.575 21.075,9.6 ; ZQ1.1 24,3 23,4 23,6.3 22.5,6.8 22.5,9.3 22.2,9.6 21.075,9.6
NetDA1_3: DA1.3 R13.2 R14.1 | length 2.9
  Top Layer w0.2: DA1.3 14.375,19.575 14.85,20.05 R13.2 R14.1
NetFV1_1: FV1.1 XS1.2 | length 2.1
  Top Layer w0.2: XS1.2 5.75,12.65 5.85,12.75 FV1.1
NetFV1_3: FV1.3 XS1.3 | length 2.2
  Top Layer w0.2: XS1.3 5.7,12 5.95,11.75 FV1.3
NetFV1_4: FV1.4 R7.1 R9.1 | length 8
  Top Layer w0.15: R9.1 10.4,8.5 10.5,8.6 10.5,10.4 10.4,10.5 R7.1
  Top Layer w0.2: FV1.4 8.45,11.75 8.7,12 8.9,12 9,11.9 9,9.2 9.4,8.8 9.75,8.8 R9.1
NetFV1_6: FV1.6 R8.1 | length 5.2
  Top Layer w0.2: FV1.6 8.45,12.75 8.7,12.5 8.9,12.5 9.4,12 9.4,9.4 9.6,9.2 9.75,9.2 R8.1
NetHL1_1: HL1.1 R5.1 | length 1.6
  Top Layer w0.15: HL1.1 R5.1
NetHL2_1: HL2.1 R3.1 | length 1.6
  Top Layer w0.15: HL2.1 R3.1
NetHL3_1: HL3.1 R4.1 | length 1.6
  Top Layer w0.15: HL3.1 R4.1
NetHL4_1: HL4.1 R6.1 | length 1.6
  Top Layer w0.15: HL4.1 R6.1
NetR23_2: R23.2 VT3.1 VT3.4 | length 7.4
  Top Layer w0.2: VT3.4 v1(30.125,12) ; R23.2 v1(32.2,8.5) 32.2,8.975 31.875,9.3 VT3.1
  Bottom Layer w0.2: v1(30.125,12) 32.2,9.925 v1(32.2,8.5)
NetR24_2: R24.2 XS2.2 | length 2.4
  Top Layer w0.15: R24.2 32.25,15 32.5,15.25 XS2.2
NetR25_2: R25.2 XS2.4 | length 2.4
  Top Layer w0.15: R25.2 32.25,16 32.5,16.25 XS2.4
NetR26_2: R26.2 XS2.6 | length 2.4
  Top Layer w0.15: R26.2 32.25,17 32.5,17.25 XS2.6
NetR27_2: R27.2 XS2.8 | length 2.4
  Top Layer w0.15: R27.2 32.25,18 32.5,18.25 XS2.8
NetR28_2: R28.2 XS2.10 | length 2.4
  Top Layer w0.15: R28.2 32.25,19 32.5,19.25 XS2.10
NetR29_2: R29.2 R35.2 VT3.3 XS2.1 | length 32.6
  Top Layer w0.15: R35.2 18.5,19.3 18.7,19.5 20.7,19.5 22.5,21.3 26.4,21.3 27.1,22 32.7,22 35.6,19.1 35.6,15.5 34.85,14.75 XS2.1
  Top Layer w0.2: v1(31,12) 31,10.99 31.16,11.15 VT3.3@31.875,11.15 ; R29.2 v1(32.25,14) 33,14.75 XS2.1
  Bottom Layer w0.2: v1(31,12) 32.25,13.25 v1(32.25,14)
NetR31_2: R31.2 XS3.3 | length 2.8
  Top Layer w0.15: R31.2 31.8,3.5 33.05,4.75 XS3.3
NetR32_2: R32.2 XS3.4 | length 2.6
  Top Layer w0.15: R32.2 31.9,4.5 32.65,5.25 XS3.4
NetR33_1: R33.1 R34.1 XS3.6 | length 3.4
  Top Layer w0.15: R33.1 R34.1 31.9,6.5 32.15,6.25 XS3.6
RST_N: C4.2 DD1.7 KT5.1 R12.1 | length 11.9
  Top Layer w0.15: DD1.7 v1(20.2,10.25) ; KT5.1 20,2.4 20.7,3.1 20.7,4.75 20.5,4.95 C4.2 R12.1 19,5.5 20.2,6.7 v1(20.2,7.5)
  Bottom Layer w0.15: v1(20.2,7.5) v1(20.2,10.25)
SWCLK: DD1.37 KT6.1 | length 7.1
  Top Layer w0.15: DD1.37 13.25,6.15 12.5,5.4 12.5,3.6 13.7,2.4 14.8,2.4 15,2.2 KT6.1
SWDIO: DD1.34 KT7.1 | length 9.5
  Top Layer w0.15: KT7.1 12.5,3.2 12.2,3.5 12.2,5.4 11.1,6.5 10.8,6.5 10.5,6.8 10.5,7.7 10.7,7.9 11.75,7.9 12.1,8.25 DD1.34
T_RST: DD1.12 R21.1 VT2.1 | length 18.8
  Top Layer w0.15: DD1.12 19.85,12.75 20.4,13.3 20.4,13.6 20.55,13.75 R21.1 21.05,14.25 21.25,14.45 v1(21.25,15) ; v1(21.75,18.75) 21.75,19.55 22.9,20.7 26.2,20.7 27,19.9 29.225,19.9 29.6,20.275 29.6,20.65 30.15,21.2 VT2.1
  Bottom Layer w0.15: v1(21.25,15) 21.25,16.25 21.75,16.75 v1(21.75,18.75)
T_RST_SENSE: DD1.17 R20.1 VT1.2 | length 18.7
  Top Layer w0.15: DD1.17 16.75,13.85 19.6,16.7 20,16.7 20.2,16.9 20.2,18.95 ; R20.1 20.2,18.95 ; VT1.2 29.125,20.375 29,20.25 27.15,20.25 26.4,21 22.7,21 20.65,18.95 20.2,18.95
T_TCK: DD1.15 DD2.16 | length 8
  Top Layer w0.15: DD1.15 17.75,14.05 19.8,16.1 21.5,16.1 22.65,17.25 DD2.16
T_TDI: DD1.13 DD2.14 | length 8.3
  Top Layer w0.15: DD1.13 18.75,14.25 19.5,15 v1(20.25,15) ; v1(21,17) 22.25,18.25 DD2.14
  Bottom Layer w0.15: v1(20.25,15) 20.25,16.25 v1(21,17)
T_TDO: DD1.16 DD2.15 | length 8.6
  Top Layer w0.15: DD1.16 17.25,13.95 19.7,16.4 21.3,16.4 22.65,17.75 DD2.15
T_TMS: DD1.14 DD3.3 | length 16.3
  Top Layer w0.15: DD1.14 18.25,14.15 19.9,15.8 21.5,15.8 22.7,14.6 22.7,12.9 23.5,12.1 26.8,12.1 27.202,12.502 27.798,12.502 28.1,12.2 28.1,11.81 28.098,11.808 28.098,11.392 28.1,11.39 28.1,10.7 27.787,10.387 DD3.3
T_TMS_DIR: DD1.11 DD3.5 | length 9
  Top Layer w0.15: DD1.11 19.95,12.25 20.8,13.1 22.1,13.1 23.4,11.8 26.7,11.8 27,11.5 DD3.5
TACT: DD1.25 R2.1 SB1.2 | length 17.1
  Top Layer w0.15: SB1.2 4.9,6.25 5.1,6.45 R2.1 6.65,6.45 6.9,6.7 6.9,9.9 v1(8,11) ; v1(8.2,14) 8.2,13.6 8.3,13.5 9.1,13.5 9.5,13.1 11.4,13.1 11.75,12.75 DD1.25
  Bottom Layer w0.15: v1(8,11) 8,13.2 8.2,13.4 v1(8.2,14)
TRACE_SWO: DD1.39 KT4.1 R33.2 | length 28.8
  Top Layer w0.15: DD1.39 14.25,6.2 14.05,6 13.6,6 12.8,5.2 12.8,3.7 13.8,2.7 15.1,2.7 15.3,2.5 18.5,2.5 19,2 19,1 19.6,0.4 27.65,0.4 28.75,1.5 KT4.1 31,5.4 30.9,5.5 R33.2
TVCC: C16.1 C17.2 C18.2 DD2.19 DD3.6 R22.2 R29.1 R30.1 XS3.1 | length 42.4
  Top Layer w0.15: R29.1@30.725,14 30.9,14 31,14.1 31,19.9 31.1,20 R22.2 ; R30.1 31.8,2.5 33.05,3.75 XS3.1
  Top Layer w0.2: DD2.19 23.775,15.025 24.05,14.75 C17.2 ; v1(25.75,11.25) 26.2,11.25 26.337,11.112 DD3.6 ; R29.1 v1(29.9,14) 29.9,13.6 30.1,13.4 31.9,13.4 33.9,11.4 33.9,8.1 35.7,6.3 35.7,4 35.3,3.6 34.6,3.6 34.45,3.75 XS3.1 ; R29.1@30.637,13.912 R29.1@30.725,14
  Top Layer w0.25: C17.2 C16.1 24.05,12.65 24.252,12.448 26.548,12.448 27,12.9 27.9,12.9 28.7,12.1 v1(28.7,11.6) ; C18.2 v1(25.75,11.25)
  Bottom Layer w0.4: v1(25.75,11.25) 28.35,11.25 v1(28.7,11.6) 28.7,12.318 29.9,13.518 v1(29.9,14)
TVCC_BR: DD1.19 R23.1 VT3.2 VT3.5 | length 26.6
  Top Layer w0.15: DD1.19 v1(15.75,14.35) ; v1(25.75,13.25) 26.25,13.25 26.3,13.3 28.2,13.3 29.5,12 29.5,10.5 ; VT3.5 29.5,10.5 ; VT3.2 32.3,10.5 32.8,10 32.8,8.3 32.4,7.9 30.7,7.9 30.55,8.05 R23.1 30,8.5 29.5,9 29.5,10.5
  Bottom Layer w0.15: v1(15.75,14.35) 16.6,13.5 22.3,13.5 22.6,13.8 24.1,13.8 24.65,13.25 v1(25.75,13.25)
TVCC_SENSE: C19.2 DD1.18 R35.1 R36.2 | length 7.2
  Top Layer w0.15: R36.2 C19.2 ; DD1.18 16.25,13.875 16.4,14.025 16.4,14.5 16.5,14.6 C19.2 ; R35.1 18.5,16 17.55,15.05 C19.2
UART_RX: DD1.31 DD2.18 | length 19.4
  Top Layer w0.15: v1(11.7,9.75) DD1.31 ; v1(23.3,13.2) 23.3,14.8 23,15.1 23,16.1 23.15,16.25 DD2.18
  Bottom Layer w0.15: v1(11.7,9.75) 12.25,9.75 12.8,10.3 12.8,13 13,13.2 v1(23.3,13.2)
UART_TX: DD1.30 DD2.17 | length 19.8
  Top Layer w0.15: v1(11.7,10.5) 11.95,10.25 DD1.30 ; v1(22.2,16) 22.95,16.75 DD2.17
  Bottom Layer w0.15: v1(11.7,10.5) 12.2,10.5 12.5,10.8 12.5,13.1 12.9,13.5 14.8,13.5 15.1,13.8 15.1,14.5 15.5,14.9 16,14.9 17.1,13.8 22.1,13.8 22.5,14.2 22.5,15.1 22.2,15.4 v1(22.2,16)
USBD_N: DD1.32 R8.2 | length 1.8
  Top Layer w0.2: R8.2 11.25,9.2 12,9.2 12.05,9.25 DD1.32
USBD_P: DD1.33 R9.2 | length 1.8
  Top Layer w0.2: R9.2 11.25,8.8 12,8.8 12.05,8.75 DD1.33
USBD_PULLUP: DD1.29 R7.2 | length 2.3
  Top Layer w0.15: R7.2 10.95,10.9 11.048,10.998 11.298,10.998 11.4,11.1 11.9,11.1 12.25,10.75 DD1.29
VBUS: FP1.1 XS1.1
VBUS_DETECT: DD1.26 R10.1 R11.2 | length 3.5
  Top Layer w0.15: R11.2 10.4,11.5 10.5,11.6 10.5,12.4 10.6,12.5 10.775,12.5 11.39,12.5 11.392,12.498 11.502,12.498 11.75,12.25 DD1.26
VCC3P3: C7.2 C8.2 C9.2 C10.2 C11.2 C14.2 C15.2 DA1.1 DD1.1 DD1.24 DD1.36 DD1.48 DD2.2 DD2.10 DD3.1 KT3.1 R2.2 R3.2 R12.2 R14.2 R15.2 R16.2 R17.2 R18.2 R19.2 R20.2 VT3.6 | length 99.7
  Top Layer w0.15: R2.2 R3.2 6,4.1 6.1,4 v1(10,4) ; R14.2 15.5,18.375 15.625,18.5 17.375,18.5 17.5,18.375 C8.2 ; v1(17.3,4.5) 18.9,4.5 19,4.4 R12.2 ; C10.2 C10.2@18,5.1 ; v1(23,20) 23.4,20.4 26.1,20.4 26.25,20.25 DD2.10
  Top Layer w0.2: C11.2 v1(11.6,7.25) DD1.36 ; C9.2 12,14 12.6,13.4 DD1.24 ; R19.2 R18.2 ; v1@14.5,3.5 R18.2 ; R15.2 R16.2 R18.2 ; v1(17.3,4.5) 17.3,4.9 17.35,4.95 C10.2 ; KT3.1 v1(18.5,21.25) ; C10.2@18,5.1 18,5.25 18.75,6 DD1.48 19.25,6.6 19.4,6.75 DD1.1 ; v1(19.5,17.3) R20.2 ; R17.2 22.3,10.5 23.3,9.5 v1(24.8,9.5) ; v1(25.75,10.25) 26.2,10.25 26.337,10.387 DD3.1 ; DD2.2 27.225,14.925 27.45,14.7 C14.2 v1(28.1,14) ; VT3.6@30.125,9.85 30.84,9.85 31,10.01 v1(31,9.2)
  Top Layer w0.25: C15.2 v1(25.75,10.25)
  Bottom Layer w0.4: v1(10,4) 11.6,4 ; v1(11.6,7.25) 11.6,4 ; v1(11.6,14) 11.6,15.7 13.2,17.3 v1(16.5,17.3) ; v1(17.5,17.3) v1(19.5,17.3) 19.5,20 ; v1(18.5,21.25) 19.5,20.25 19.5,20 ; v1(25.75,10.25) 24.8,10.25 ; v1(28.1,14) 27,14 ; v1(31,9.2) 29.55,7.75 24.8,7.75 ; 11.6,4 13.9,4 v1(14.5,3.4) 16.2,3.4 v1(17.3,4.5) 22.1,4.5 24.8,7.2 24.8,7.75 ; 19.5,20 v1(23,20) 23,16.95 24.45,15.5 26,15.5 27,14.5 27,14 ; 24.8,7.75 v1(24.8,9.5) 24.8,10.25 ; 24.8,10.25 24.8,11.3 25.5,12 26.1,12 27,12.9 27,14
VCC5P0: C3.2 FP1.2 FV1.5 L1.1 R10.2 | length 9.4
  Top Layer w0.15: 7.25,13.2 8.95,13.2 9.65,12.5 R10.2
  Top Layer w0.25: L1.1 7.75,17.25 7.25,16.75 7.25,13.2 7.25,12.5 7.5,12.25 FV1.5
pads on no net: DD1.2 DD1.3 DD1.4 DD1.10 DD1.27 DD1.28 DD1.38 DD1.45 DD1.46 DD2.12 DD2.13 DD2.20 SB1.4 XS1.0 XS2.7 ZQ1.2 ZQ1.4

## Polygon pours and split planes (outlines as drawn)
GND on Bottom Layer "GND_L02_P000" (solid, remove dead copper, pour order 0): 0,0 0,23 40,23 40,0
no net on Bottom Solder "GND_L02_P-001" (solid, remove dead copper): 13.25,12.75
GND on Top Layer "GND_L01_P022" (solid, remove dead copper, pour order 22): 36.5,23 39,23 39,0 36.5,0
GND on Top Layer "GND_L01_P020" (solid, remove dead copper, pour order 20): 2.1,18.8 1.9,19 1.9,21.9 2.2,22.2 4.3,22.2 4.6,21.9 4.6,19 4.4,18.8
VCC3P3 on Top Layer "VCC3P3_L01_P018" (solid, remove dead copper, pour order 18): 13.875,18.425 14.95,18.425 15.05,18.325 15.05,17.825 15.15,17.725 15.925,17.725 16.025,17.825 16.025,18.275 17.825,18.275 17.9,18.2 17.9,17.2 17.7,17 14.9,17 14.3,17.6 14.3,18 14.175,18.125 13.875,18.125
GND on Top Layer "GND_L01_P014" (solid, remove dead copper, pour order 14): 9.3,18.7 10.3,18.7 10.375,18.775 11.75,18.775 11.75,17.55 13.25,17.55 13.25,18.775 13.9,18.775 13.9,19.075 13.25,19.075 13.25,20.075 13.9,20.075 13.9,20.375 13.25,20.375 13.25,20.5 13.45,20.7 15.8,20.7 16.1,20.4 16.1,18.8 16.175,18.725 17.825,18.725 17.9,18.8 17.9,19.9 16.175,21.625 12.5,21.625 11.75,20.875 11.75,19.725 10.375,19.725 10,20.1 9.3,20.1 9.1,19.9 9.1,18.9
NetC2_2 on Top Layer "NETC2_2_L01_P012" (solid, remove dead copper, pour order 12): 7.3,18.9 7.4,18.8 7.9,18.8 8.9,17.8 10.4,17.8 10.725,18.125 11.1,18.125 11.1,18.425 9.275,18.425 8.9,18.8 8.9,19.4 8.7,19.6 7.4,19.6 7.3,19.5
VCC5P0 on Top Layer "VCC5P0_L01_P010" (solid, remove dead copper, pour order 10): 6,16 6,18 6.2,18.2 8.1,18.2 8.2,18.1 8.2,17.5 8.1,17.4 7.3,17.4 7,17.1 7,16 6.8,15.8 6.2,15.8
VBUS on Top Layer "VBUS_L01_P008" (solid, remove dead copper, pour order 8): 3.775,13.5 3.775,13.1 5.6,13.1 6.95,14.45 6.95,15 6.05,15 6.05,14.45 5.1,13.5
GND on Top Layer "GND_L01_P006" (solid, remove dead copper, pour order 6): 5.3,8.4 5.3,10.325 5.125,10.5 3.775,10.5 3.775,10.9 5.25,10.9 5.25,11.15 3.775,11.15 3.775,11.55 5.65,11.55 6.1,11.1 6.1,8.6 5.9,8.4
NetC1_2 on Top Layer "NETC1_2_L01_P004" (solid, remove dead copper, pour order 4): 5,7.5 5,9.55 3,9.55 3,14.45 5,14.45 5,17.7 4.5,18.2 0,18.2 0,7.5
NetC1_2 on Top Layer "NETC1_2_L01_P002" (solid, remove dead copper, pour order 2): 5.1,7.5

## Other copper
Bottom Layer:
  rectangle net VCC3P3: 16.5,17 17.5,17.6

## Silkscreen, mask and mechanical layers (free items; w line width, h text height)
Top Overlay:
  text ".PCB_Week" at 25.5,4.25 h2
  text "A_D" at 26.75,3.25 h1.5
Bottom Overlay:
  lines w0.25: 39.5,1.5 32.5,1.5 32,2 32,8.5 32.5,9 39.5,9 ; 39.5,11 32.5,11 32,11.5 32,22 32.5,22.5 39.5,22.5
  text "JTAG: / 1-TVCC / 2-TMS\SWDIO / 3-GND / 4-TCK\SWCLK / 5-GND / 6-TDO / 7-NC / 8-TDI / 9-GND / 10-NRST" at 39,11 h1.5
  text "DEBUG: / 1-TVCC / 2-GND / 3-RX / 4-TX / 5-GND / 6-NC\SWO" at 39,-0.5 h1.5
Bottom Solder:
  rectangle: 24.5,16 26.5,19
  rectangle: 11.75,18.25 13.25,20.25
  rectangle: 13,7 19,13
1 - Board Outline:
  the board outline again, w0.2